# EAGLE board femtoBeacon_dongle_r2.0.6_RGB (EAGLE 7.6.0)
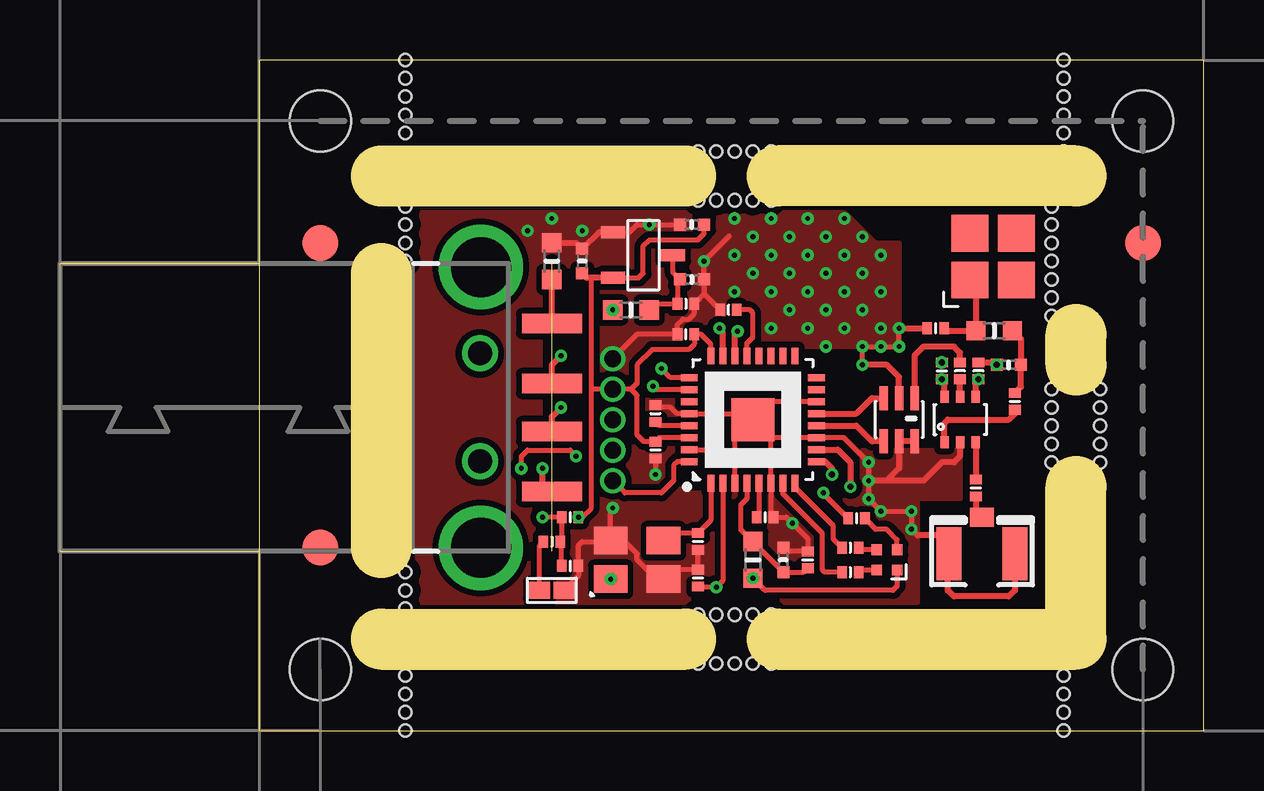
[diagram p0: board, top side]
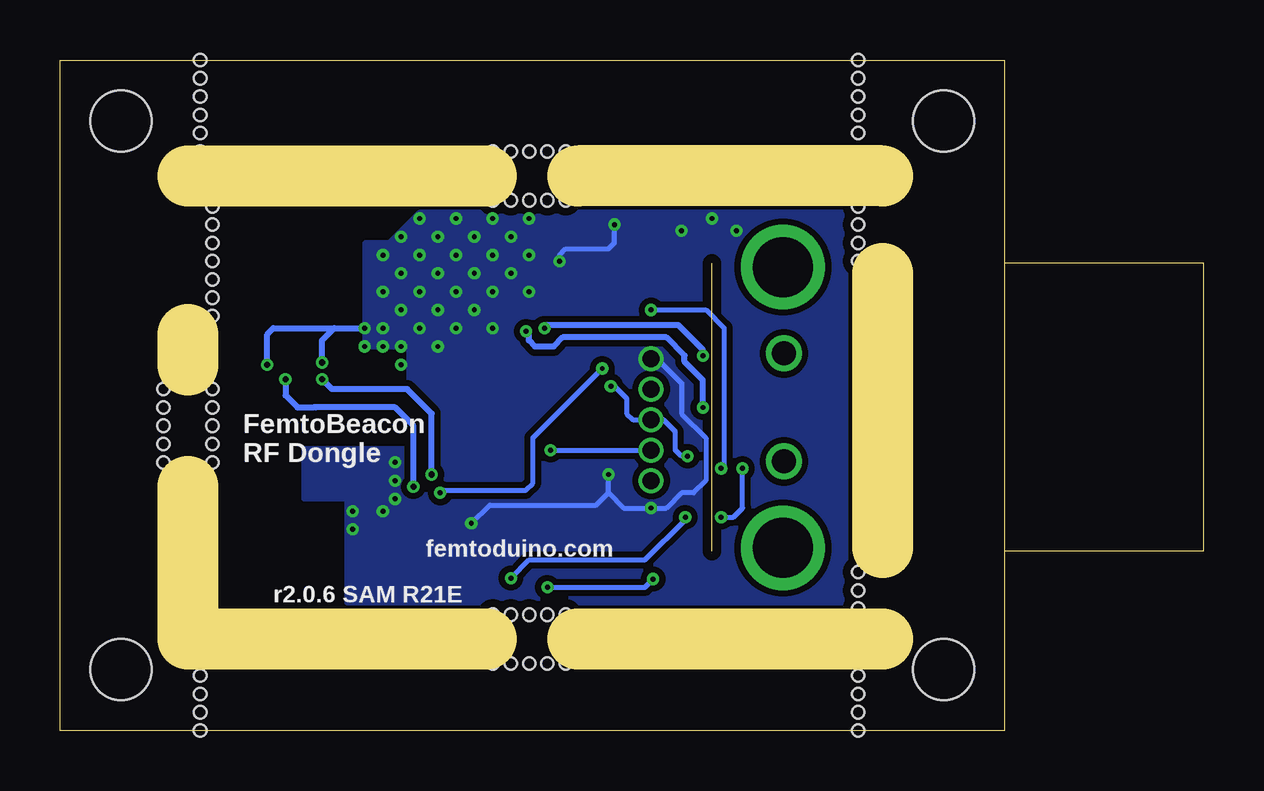
[diagram p1: board, bottom side, seen from below]

Size 47.68 x 27.94 mm. Coordinates in mm from the lower left corner, seen from the top.
Outline: 8.31,19.46 8.31,27.94 47.68,27.94 47.68,0 8.31,0 8.31,7.46
Outline: 8.31,19.46 8.31,7.46
Outline: 20.5,7.46 20.5,19.46
Outline: 8.31,19.46 0,19.46 0,7.46 8.31,7.46
Copper layers (1*16): Top 0.035559375mm / dielectric 1.6mm / Bottom 0.035559375mm
Design rules "oshpark-2layer *": minimum track width 6mil, minimum drill 10mil, track to track 6mil, track to pad 6mil, pad to pad 6mil, via to via 6mil, smd to smd 6mil, copper to edge 15mil, drill to drill 6mil, minimum pad ring 5mil, minimum via ring 5mil, stop-mask expansion 2.5mil, vias tented up to drill 10mil, thermal gap 10mil
Holes 2.54 mm at 10.85,2.54 10.85,25.4 45.14,25.4 45.14,2.54
Holes 0.51 mm at 14.4,21.84 14.4,21.08 14.4,20.32 14.4,19.56 14.4,5.08 14.4,5.84 14.4,6.6 28.12,4.83 27.36,4.83 26.6,4.83 28.88,4.83 29.64,4.83 41.33,12.7 41.33,13.46 41.33,14.22 41.33,11.94 41.33,11.18 43.36,12.7 43.36,13.46 43.36,11.94 43.36,11.18 43.36,14.22 28.12,2.79 27.36,2.79 26.6,2.79 28.88,2.79 29.64,2.79 28.12,22.1 27.36,22.1 26.6,22.1 28.88,22.1 29.64,22.1 28.12,24.13 27.36,24.13 26.6,24.13 28.88,24.13 29.64,24.13 41.84,24.13 41.84,24.89 41.84,25.65 41.84,26.42 41.84,27.18 41.84,27.94 41.84,3.05 41.84,0 41.84,0.76 41.84,1.52 41.84,2.29 14.4,24.89 14.4,25.65 14.4,26.42 14.4,27.18 14.4,27.94 14.4,0 14.4,0.76 14.4,1.52 14.4,2.29 41.33,21.84 41.33,21.08 41.33,20.32 41.33,19.56 41.33,18.8 41.33,18.03 41.33,17.27
Milling: 7 lines

## Footprints (pad centres in the part's own frame; a part is rotated, then mirrored left to right if it is on the bottom)
AS222-92LF = smd 0.35 x 0.5: PIN1 -0.65,-0.95; PIN2 0,-0.95; PIN3 0.65,-0.95; PIN4 0.65,0.95; PIN5 0,0.95; PIN6 -0.65,0.95
SPST_SMD = smd 0.889 x 0.699: 1 -0.508,0; 2 0.508,0
PART = smd 0.4 x 0.5: 1 -0.35,0; 2 0.35,0
_0402MP = smd 0.5 x 0.5: 1 -0.508,0; 2 0.508,0
USB_A-SMT = drill 2.5 pad 3.302: D1 -5.85,2.958; D2 5.85,2.958 | drill 1: D3 -2.25,3; D4 2.25,3 | smd 0.8 x 2.5: D+ 1,0; D- -1,0; GND 3.5,0; VBUS -3.5,0
_0603MP = smd 0.8 x 0.8: 1 -0.762,0; 2 0.762,0
FIDUCIAL_1MM = smd 1.5 x 1.5: 1 0,0
MCP1700T-3302E/TT = smd 0.5 x 1: GND -0.95,-1.25; VIN 0,1.25; VOUT 0.95,-1.25
LRTB_R48G = smd 0.45 x 0.45: 1 0.425,0.425; 2 0.425,-0.425; 3 -0.425,-0.425; 4 -0.425,0.425
1X5_ROUND = drill 0.7 pad 1: P$1 0,0; P$2 0,-1.27; P$3 0,-2.54; P$4 0,-3.81; P$5 0,-5.08
0479480001 = smd 1.54 x 1.54: ANT -0.963,0.963; NC1 0.978,0.963; NC2 0.978,-0.978; NC3 -0.963,-0.978
0805_BALUN = smd 1 x 0.35: 1 -0.9,0.65; 2 -0.9,0; 3 -0.9,-0.65; 4 0.9,-0.65; 5 0.9,0; 6 0.9,0.65
QFN32 = smd 0.7 x 0.3: 1 -2.65,1.75; 2 -2.65,1.25; 3 -2.65,0.75; 4 -2.65,0.25; 5 -2.65,-0.25; 6 -2.65,-0.75; 7 -2.65,-1.25; 8 -2.65,-1.75; 17 2.65,-1.75; 18 2.65,-1.25; 19 2.65,-0.75; 20 2.65,-0.25; 21 2.65,0.25; 22 2.65,0.75; 23 2.65,1.25; 24 2.65,1.75 | smd 0.3 x 0.7: 9 -1.75,-2.65; 10 -1.25,-2.65; 11 -0.75,-2.65; 12 -0.25,-2.65; 13 0.25,-2.65; 14 0.75,-2.65; 15 1.25,-2.65; 16 1.75,-2.65; 25 1.75,2.65; 26 1.25,2.65; 27 0.75,2.65; 28 0.25,2.65; 29 -0.25,2.65; 30 -0.75,2.65; 31 -1.25,2.65; 32 -1.75,2.65 | smd 1.8 x 1.8: 33 0,0
U.FL = smd 2.2 x 1.05: 1 0,1.375; 2 0,-1.375 | smd 0.8 x 1: 3 1.525,0
TSX-3225 = smd 1.4 x 1.15: 1 -1.1,-0.8; 2 1.1,-0.8; 3 1.1,0.8; 4 -1.1,0.8

## Placement (x,y rotation side)
ASWITCH  AS222-92LF  [AS222-92LF]  37.52,12.95 0 top
BTN  DNP  [SPST_SMD]  20.5,5.84 0 top
C1  0.1uF  [PART]  21.26,6.86 0 top
C2  0.1uF  [PART]  27.87,17.53 180 top
C5  2.2uF  [_0402MP]  26.34,21.08 180 top
C6  2.2uF  [_0402MP]  26.34,18.8 0 top
C7  0.47uF  [PART]  26.09,17.78 0 top
C8  0.1uF  [PART]  31.17,7.11 90 top
C9  0.1uF  [PART]  24.82,13.21 90 top
C10  0.1uF  [PART]  26.09,16.51 180 top
C11  1.2pF  [_0402MP]  39.55,15.24 180 top
C13  DNP  [PART]  36.5,16.76 180 top
C14  9pF  [PART]  26.6,6.35 270 top
C15  9pF  [PART]  26.6,7.87 270 top
C16  0.1uF  [PART]  24.82,11.68 270 top
C17  0.1uF  [PART]  29.39,8.89 0 top
C18  22pF  [PART]  37.52,14.99 270 top
C19  22pF  [PART]  38.28,14.99 270 top
C20  22pF  [PART]  36.76,14.99 90 top
C21  10uF  [_0402MP]  21.77,19.56 270 top
C22  10uF  [_0402MP]  30.15,7.11 270 top
C23  22pF  [PART]  38.18,10.11 90 top
C24  22pF  [PART]  39.8,13.72 90 top
CN1  [USB_A-SMT]  20.5,13.46 90 top
FB1  [_0603MP]  20.5,19.56 90 top
FB2  [_0603MP]  23.8,17.53 0 top
FID1  FIDUCIAL  [FIDUCIAL_1MM]  10.85,7.62 0 top
FID2  FIDUCIAL  [FIDUCIAL_1MM]  10.85,20.32 0 top
FID3  FIDUCIAL  [FIDUCIAL_1MM]  45.14,20.32 0 top
L1  1.8nH  [_0603MP]  38.94,16.66 0 top
L6  10uH  [_0603MP]  28.88,7.11 90 top
LDO_VREG  MCP1700T-3302E/TT  [MCP1700T-3302E/TT]  24.31,19.81 270 top
R1  330  [PART]  20.5,7.87 0 top
R2  10K  [PART]  21.26,8.89 0 top
R4  330  [PART]  32.95,6.6 0 top
R6  330  [PART]  32.95,7.62 0 top
R7  330  [PART]  33.2,8.84 0 top
RGBLED  LRTB_R48G  [LRTB_R48G]  34.47,7.11 270 top
U$1  1X5_ROUND  [1X5_ROUND]  23.04,15.49 0 top
U$6  0479480001  [0479480001]  38.89,19.74 90 top
U$12  JOHANSON_2450BM15A0015E  [0805_BALUN]  34.98,12.95 270 top
U$76  ATSAMR21E18A-MUT  [QFN32]  28.88,12.95 90 top
UFLANT  uFL  [U.FL]  38.43,7.37 90 top
XOSCRF  16MHz  [TSX-3225]  24.06,7.11 0 top

## Library data of the parts
ASWITCH = skyworks_solutions; MFR_ID: AS222-92LF
BTN = femtoduino
C1 C2 C8-C10 C16 C17 = parts_0201; MFR_ID: GRM033C80J104KE84D
C5 C6 = microbuilder; MFR_ID: C1005X5R1A225K050BC
C7 = parts_0201; MFR_ID: C0603X5R0J474K030BC
C11 = microbuilder; MFR_ID: GRM1555C1H1R2BA01D
C13 = parts_0201
C14 C15 = parts_0201; MFR_ID: C0603C0G1E090B030BG
C18-C20 C23 C24 = parts_0201; MFR_ID: GRM0335C1E220JA01D
C21 C22 = microbuilder; MFR_ID: AMK105CBJ106MV-F
CN1 = microbuilder; MFR_ID: Keystone 931
FB1 FB2 = microbuilder; MFR_ID: BLM18RK102SN1D
FID1-FID3 = adafruit
L1 = microbuilder; MFR_ID: L-14C1N8SV4T
L6 = microbuilder; MFR_ID: LQM18FN100M00D
LDO_VREG = MCP1700T-3302E_TT; MFR_ID: MCP1700T-3302E/TT
R1 R4 R6 R7 = parts_0201; MFR_ID: CRCW0201330RJNED
R2 = parts_0201; MFR_ID: RC0402FR-0710KL
RGBLED = osram_opto_LED; MFR_ID: LRTB R48G
U$1 = pins_fine_pitch
U$6 = molex-antenna-2.4GHz; MFR_ID: 51T4020
U$12 = balun; MFR_ID: 2450BM15A0015E
U$76 = atmel-samr21; MFR_ID: ATSAMR21E18A-MFT
UFLANT = adafruit; MFR_ID: 734120110
XOSCRF = crystals; MFR_ID: TSX-3225 16.0000MF09Z-AC0

## Nets
3.3V: C5.1 C10.1 C16.1 C21.2 L6.1 LDO_VREG.VOUT R2.2 RGBLED.1 U$1.P$2 U$76.24 U$76.30
ANT_LINE: C13.1 L1.1 U$6.ANT
ANT_OUT: C18.1 U$12.1
ANT_SMD: C11.1 C24.2 L1.2
ANT_UFL: C23.1 UFLANT.3
AVDD: C17.1 U$76.5
DVDD: C2.1 U$76.21
GND: ASWITCH.PIN2 BTN.2 C1.2 C2.2 C5.2 C6.2 C7.2 C8.2 C9.2 C10.2 C11.2 C13.2 C14.1 C15.2 C16.2 C17.2 C19.1 C20.2 C21.1 C22.1 FB1.2 LDO_VREG.GND U$1.P$1 U$12.2 U$12.5 U$12.6 U$76.3 U$76.6 U$76.11 U$76.14 U$76.28 U$76.33 UFLANT.1 UFLANT.2 XOSCRF.2 XOSCRF.4
N$2: R6.2 RGBLED.3
N$4: CN1.VBUS FB2.1
N$5: CN1.GND FB1.1
N$10: R7.2 RGBLED.4
N$13: R4.2 RGBLED.2
N$26: BTN.1 R1.1
PA06(R): R4.1 U$76.7
PA07(G): R6.1 U$76.8
PA08/I2C/SDA: ASWITCH.PIN6 C20.1 U$76.9
PA09/I2C/SCL: ASWITCH.PIN4 C19.2 U$76.10
PA14/XIN_MC/RX: U$76.15
PA15/XOUT_MC/TX: U$76.16
PA16/I2C: U$76.17
PA17/I2C: U$76.18
PA18/INTA: U$76.19
PA19/FSYNC: U$76.20
PA24/USBDM: CN1.D- U$76.22
PA25/USBDP: CN1.D+ U$76.23
PA27(B): R7.1 U$76.25
PA28: U$76.27
PA30/SWCLK: U$1.P$4 U$76.31
PA31/SWDIO: U$1.P$5 U$76.32
RESET: C1.1 R1.2 R2.1 U$1.P$3 U$76.26
RFN: U$12.3 U$76.13
RFP: U$12.4 U$76.12
RFSWITCH_PIN1: ASWITCH.PIN1 C24.1
RFSWITCH_PIN3: ASWITCH.PIN3 C23.2
RFSWITCH_PIN5: ASWITCH.PIN5 C18.2
VDDANA: C8.1 C22.2 L6.2 U$76.4
VDDCORE: C9.1 U$76.29
VIN: C6.1 C7.1 FB2.2 LDO_VREG.VIN
XTALIN: C14.2 U$76.2 XOSCRF.1
XTALOUT: C15.1 U$76.1 XOSCRF.3

## Tracks (layer width: path | path; a pad name or v marks a point on that pad's centre or on a via)
3.3V  (via drill 0.2 pad 0.51)
  Top 0.203: LDO_VREG.VOUT 24.12,18.86 24.31,19.05 24.31,20.19 24.56,20.45 26.6,20.45 26.85,20.7 C5.1 | U$76.24 27.13,16.1 26.72,16.51 C10.1 26.44,16.1 26.21,15.88 24.69,15.88 24.06,15.24 24.06,14.48 23.8,14.22 | 22.15,14.22 22.15,18.86 | 23.8,14.22 U$1.P$2 | U$76.30 24.99,12.2 C16.1 24.34,12.03 24.06,12.32 24.06,13.97 23.8,14.22 | R2.2 21.77,8.89 22.15,9.27 22.15,14.22 | 22.91,14.22 U$1.P$2 | U$1.P$2 22.15,14.22 | RGBLED.1 34.89,6.01 34.72,5.84 29.39,5.84 L6.1
  Top 0.254: LDO_VREG.VOUT 22.15,18.86 21.96,18.86 C21.2
  Bottom 0.203: L6.1 28.12,7.11 23.29,7.11 21.61,8.79 R2.2
  other vias: 28.88,6.35 21.61,8.89
ANT_LINE
  Top 0.254: U$6.ANT 38.18,18.52 L1.1 36.95,16.66 C13.1
ANT_OUT
  Top 0.254: C18.1 37.52,15.75 37.26,16 35.99,16 35.63,15.64 U$12.1
ANT_SMD
  Top 0.254: L1.2 40.06,16.31 C11.1 40.06,14.32 C24.2
ANT_UFL
  Top 0.254: C23.1 38.18,9.14 UFLANT.3
AVDD
  Top 0.203: U$76.5 29.13,8.98 C17.1
DVDD
  Top 0.203: U$76.21 28.63,16.13 28.88,16.38 28.88,17.4 28.75,17.53 C2.1
GND  (via drill 0.2 pad 0.51, 0.25 pad 0.51)
  Top 0.203: LDO_VREG.GND 23.74,20.76 24.06,21.08 v24.56,21.08 C5.2 | 27.9,20.61 v26.85,19.56 C6.2 26.85,18.19 | U$76.14 29.63,13.7 U$76.33 | BTN.2 21.61,6.45 C1.2 21.61,7.72 21.77,7.87 22.92,7.87 XOSCRF.4 | XOSCRF.4 23.51,7.91 24.06,7.37 24.06,7.11 24.86,6.31 XOSCRF.2 25.54,6.7 C14.1 C15.2 | 29.63,12.2 U$76.6 29.63,9 C17.2 30.28,8.89 v30.53,8.64 31.17,8 C8.2 30.31,7.46 C22.1 | U$76.33 28.63,13.2 U$76.28 25.71,13.2 25.45,13.46 24.91,13.46 C9.2 | 26.85,18.19 C7.2 26.44,17.37 26.21,17.14 25.96,17.14 25.74,16.92 C10.2 24.06,16.51 U$1.P$1 | C16.2 v24.82,10.67 | XOSCRF.4 22.96,9.19 v23.04,9.27 | U$76.3 28.13,12.2 U$76.33 | C2.2 26.85,18.19 | v33.45,15.24 v33.45,16 v34.22,16 v34.98,16 v34.98,16.76 | v35.49,8.38 v35.49,9.14 v34.22,9.14 v33.71,9.65 v33.71,10.41 v33.71,11.18 32.68,12.2 U$76.11 29.63,12.2 | 29.63,12.2 U$76.33
  Top 0.254: FB1.2 21.52,20.32 C21.1 22.47,20.76 LDO_VREG.GND | 34.47,10.41 34.98,10.92 U$12.5 U$12.6 | 34.47,10.41 v33.71,10.41 | U$12.2 34.98,14.73 34.47,15.24 v33.45,15.24 | UFLANT.2 39.81,5.84 39.55,5.59 37.26,5.59 37.01,5.84 37.01,7.32 UFLANT.1 37.06,8.08 37.01,8.13 35.74,8.13 v35.49,8.38 | C19.1 38.95,15.34 C11.2 | v34.98,16.76 C13.2 | ASWITCH.PIN2 37.52,11.43 37.26,11.18 36.76,11.18 35.99,10.41 34.47,10.41
  Bottom 0.203: v26.85,19.56 26.85,19.81 26.6,20.07 24.82,20.07 24.56,20.32 v24.56,21.08 | v30.53,8.64 29.77,9.4 25.33,9.4 24.82,9.91 | 24.82,9.91 v24.82,10.67 | 24.82,9.91 24.18,9.27 v23.04,9.27 22.41,9.27 21.77,9.91 21.26,9.91 20.75,10.41 20.75,12.19 21.77,13.21 21.77,14.48 22.79,15.49 U$1.P$1
  Bottom 0.254: C11.2 39.04,16.51 38.79,16.76 36.25,16.76 | 36.25,16.76 v34.98,16.76 | C20.2 36.76,16.26 36.25,16.76
  other vias: 33.45,17.53 33.45,19.05 33.45,20.57 34.22,19.81 32.69,19.81 32.69,18.29 32.69,16.76 34.22,18.29 34.22,16.76 32.69,21.34 31.93,20.57 31.93,19.05 31.93,17.53 31.93,16 31.17,21.34 31.17,19.81 31.17,18.29 31.17,16.76 30.41,17.53 30.41,19.05 30.41,20.57 29.64,21.34 28.88,20.57 29.64,19.81 28.88,19.05 29.64,18.29 29.64,16.76 28.12,19.81 28.12,18.29 28.12,21.34 19.48,20.83 20.5,21.34 21.77,20.83 39.04,15.24 36.76,15.34
  pour Bottom (isolate 0.254, no thermals): 14.91,21.59 32.69,21.59 33.96,20.32 34.98,20.32 34.98,16 33.15,16 33.15,11.73 37.52,11.73 37.52,9.65 35.74,9.65 35.74,5.33 14.91,5.33
  pour Top (isolate 0.254, no thermals): 14.91,21.59 32.69,21.59 33.96,20.32 34.98,20.32 34.98,16 25.83,16 25.83,9.91 33.45,9.91 33.45,11.68 37.52,11.68 37.52,9.65 35.74,9.65 35.74,5.33 14.91,5.33
N$2
  Top 0.203: RGBLED.3 33.48,7.54 R6.2
N$4  (via drill 0.2 pad 0.51)
  Top 0.254: CN1.VBUS 20.12,9.96 v20.12,10.92
  Bottom 0.203: FB2.1 20.75,17.53 19.99,16.76 19.99,11.05 v20.12,10.92
  other vias: 23.04,17.53
N$5
  Top 0.254: CN1.GND FB1.1
N$10
  Top 0.203: RGBLED.4 34.89,7.96 34.47,8.38 34.01,8.38 R7.2
N$13
  Top 0.203: RGBLED.2 33.38,6.69 R4.2
N$26
  Top 0.203: BTN.1 19.99,7.72 R1.1
PA06(R)
  Top 0.203: R4.1 31.88,6.6 31.78,6.71 31.78,8.23 30.13,9.88 U$76.7
PA07(G)
  Top 0.203: R6.1 32.23,7.98 32.23,8.53 30.63,10.14 U$76.8
PA08/I2C/SDA  (via drill 0.25 pad 0.51)
  Top 0.254: ASWITCH.PIN6 36.87,14.52 C20.1 | U$76.9 31.9,11.2 32.18,10.92 v32.18,10.67
  Bottom 0.254: v32.18,10.67 32.18,13.21 33.2,14.22 36.34,14.22 C20.1
  other vias: 36.76,14.64
PA09/I2C/SCL  (via drill 0.25 pad 0.51)
  Top 0.254: U$76.10 32.42,11.7 32.95,11.18 v32.95,10.16 | ASWITCH.PIN4 38.17,14.52 C19.2
  Bottom 0.254: v32.95,10.16 32.95,12.7 33.71,13.46 37.01,13.46 37.11,13.46 37.77,13.46 38.28,13.97 C19.2
  other vias: 38.28,14.64
PA24/USBDM  (via drill 0.2 pad 0.51)
  Top 0.254: U$76.22 28.13,16.52 v28.25,16.64 | CN1.D- 20.5,13.08 v20.88,13.46
  Bottom 0.254: v20.88,13.46 20.88,14.61 21.64,15.37 21.64,15.62 22.41,16.38 26.72,16.38 27.1,16 27.88,16 28.13,16.26 28.13,16.52 v28.25,16.64
PA25/USBDP  (via drill 0.2 pad 0.51)
  Top 0.254: CN1.D+ 20.5,15.24 v20.88,15.62 | U$76.23 27.63,16.62 v27.48,16.76
  Bottom 0.254: v20.88,15.62 20.88,15.88 21.9,16.89 27.36,16.89 v27.48,16.76
PA27(B)  (via drill 0.2 pad 0.51)
  Top 0.203: R7.1 31.83,9.86 v31.83,9.91 | U$76.25 25.46,14.7 v25.07,15.09
  Bottom 0.203: v31.83,9.91 31.73,10.01 28.27,10.01 27.97,10.31 27.97,12.19 v25.07,15.09
PA30/SWCLK  (via drill 0.2 pad 0.51)
  Top 0.203: U$76.31 27.21,11.7 v27.23,11.68
  Bottom 0.203: v27.23,11.68 U$1.P$4
PA31/SWDIO
  Top 0.203: U$76.32 25.73,11.2 25.58,11.05 25.58,10.41 25.07,9.91 23.55,9.91 U$1.P$5
RESET  (via drill 0.2 pad 0.51)
  Top 0.203: C1.1 20.91,7.81 R1.2 20.91,7.94 R2.1 v20.12,8.89 | U$76.26 24.86,14.2 v24.72,14.35 | v19.23,10.92 19.23,11.43 19.48,11.68 21.26,11.68 v21.52,11.43
  Bottom 0.203: v24.72,14.35 24.56,14.35 24.06,13.84 24.06,13.21 23.8,12.95 U$1.P$3 22.53,12.95 22.02,12.45 22.02,11.68 21.77,11.43 v21.52,11.43 | v19.23,10.92 19.23,9.27 19.61,8.89 v20.12,8.89
RFN
  Top 0.254: U$76.13 33.2,13.2 33.85,13.85 U$12.3
RFP
  Top 0.254: U$76.12 33.2,12.7 33.85,12.05 U$12.4
RFSWITCH_PIN1
  Top 0.254: ASWITCH.PIN1 36.87,12.81 37.01,12.95 39.55,12.95 39.8,13.21 C24.1
RFSWITCH_PIN3
  Top 0.254: ASWITCH.PIN3 C23.2
RFSWITCH_PIN5
  Top 0.254: ASWITCH.PIN5 C18.2
VDDANA
  Top 0.203: U$76.4 28.63,9.66 28.37,9.4 28.37,8.38 L6.2 C22.2 31.01,6.6 C8.1
VDDCORE
  Top 0.203: U$76.29 24.97,12.7 C9.1
VIN
  Top 0.203: FB2.2 24.82,17.78 C7.1 25.74,18.7 C6.1 25.56,19.07 LDO_VREG.VIN
XTALIN  (via drill 0.2 pad 0.51)
  Top 0.203: C14.2 27.33,6 v27.36,5.97 27.63,6.24 U$76.2
  Bottom 0.203: v27.36,5.97 23.3,5.97 XOSCRF.1
  other vias: 22.96,6.31
XTALOUT
  Top 0.203: XOSCRF.3 25.47,8.22 C15.1 27.13,8.76 U$76.1

## Text on the board
bNames: FemtoBeacon / RF Dongle | femtoduino.com | r2.0.6 SAM R21E